# EAGLE board pcb_pedale_test-H743-TLV320AIC23B (EAGLE 9.6.2)
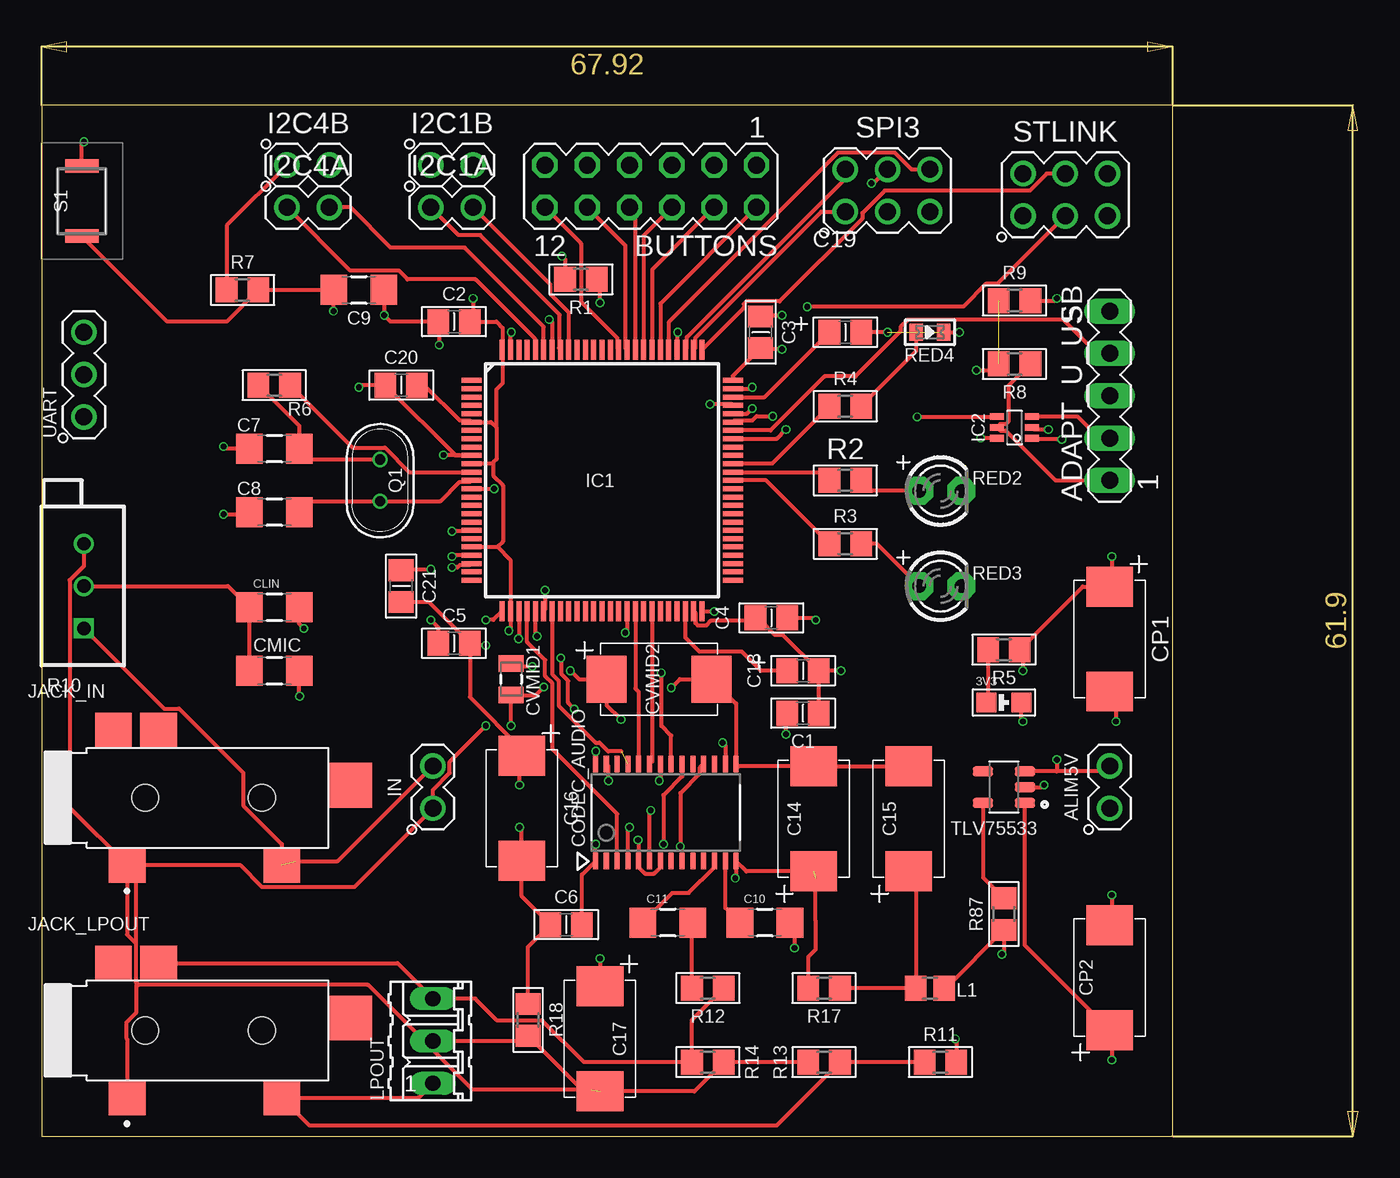
[diagram p0: board, top side]
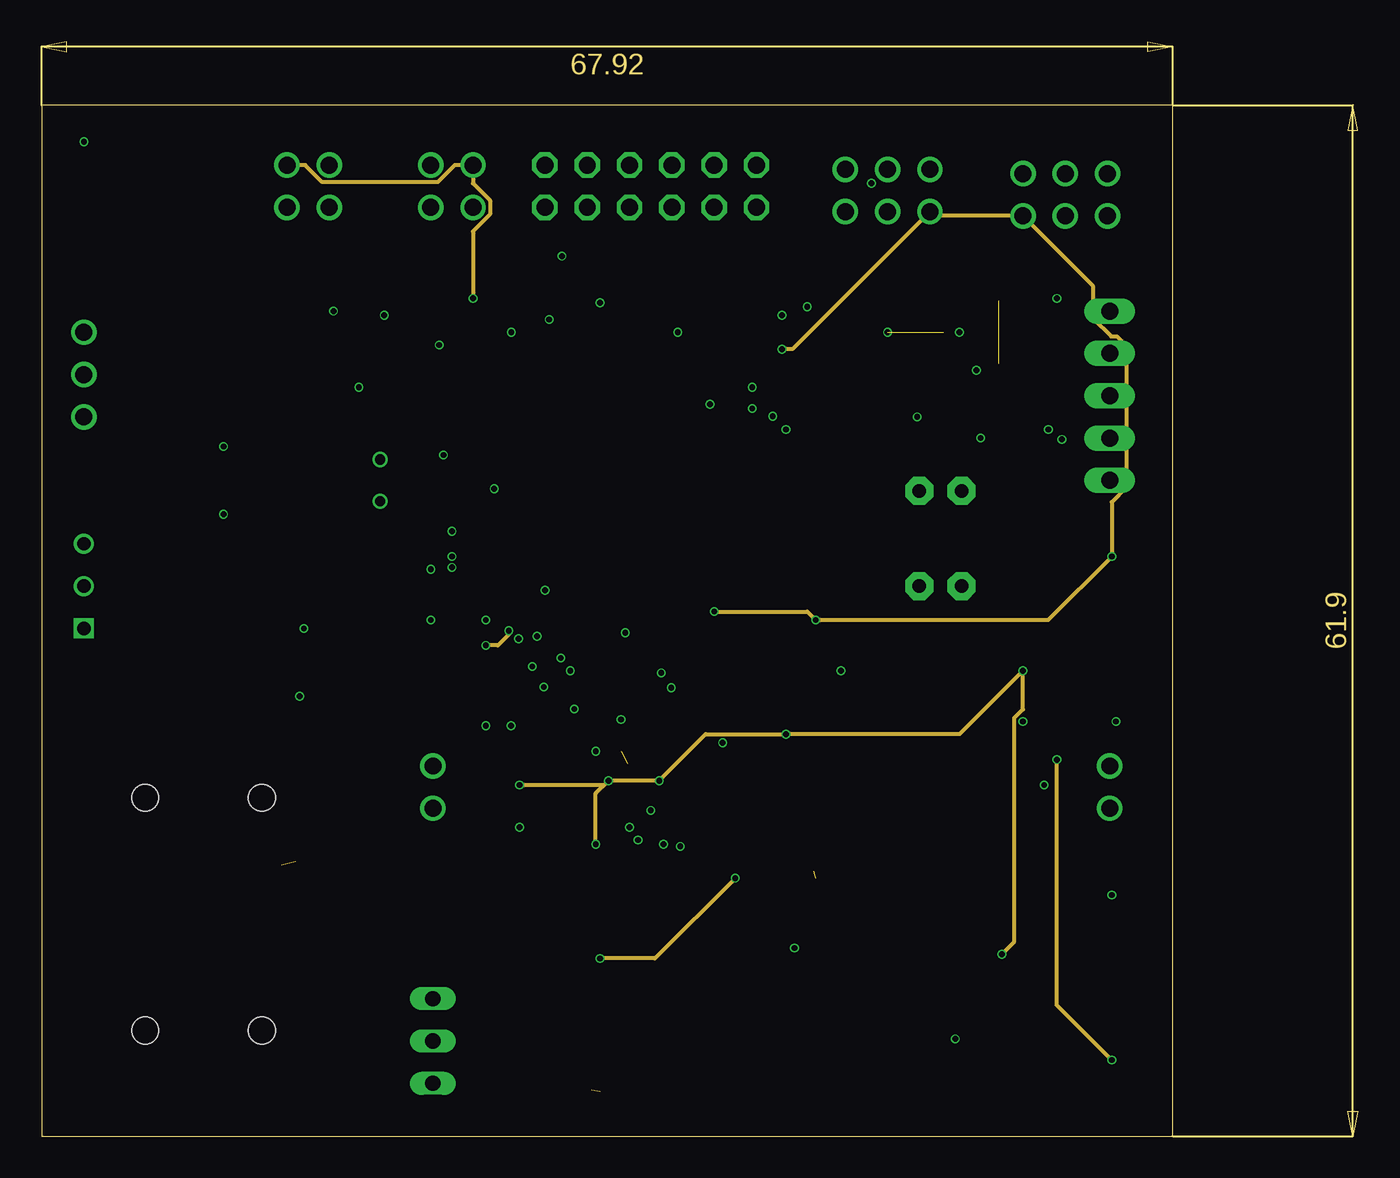
[diagram p1: board, inner layer 3V3]
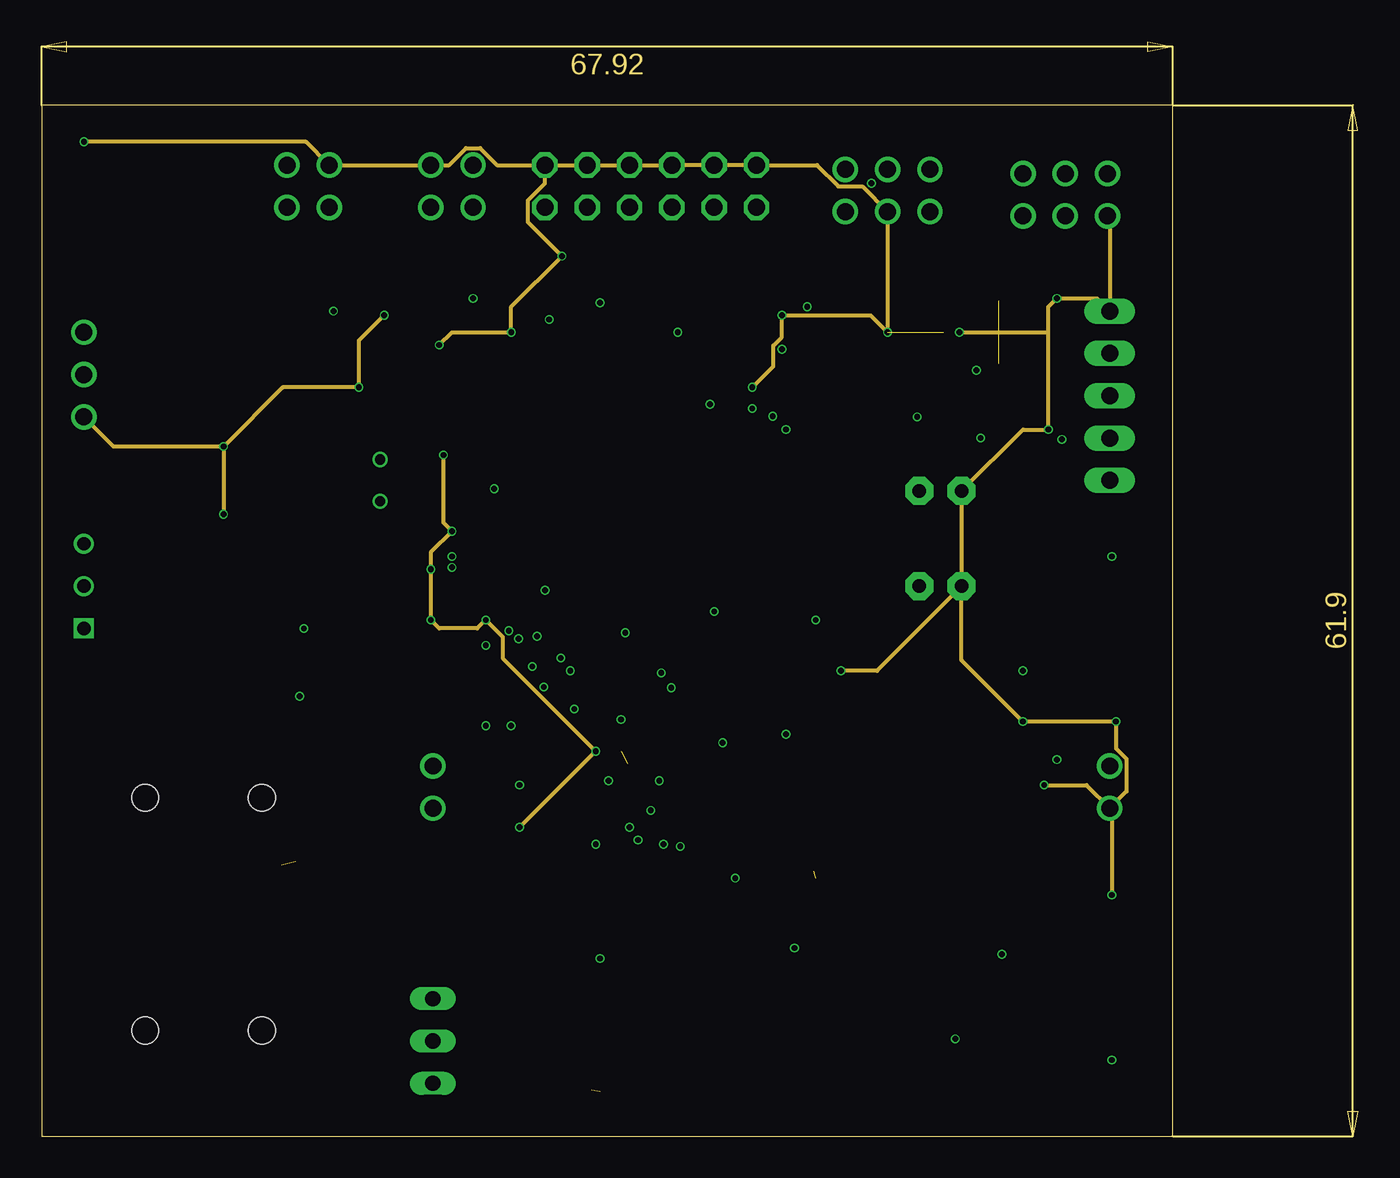
[diagram p2: board, inner layer GND]
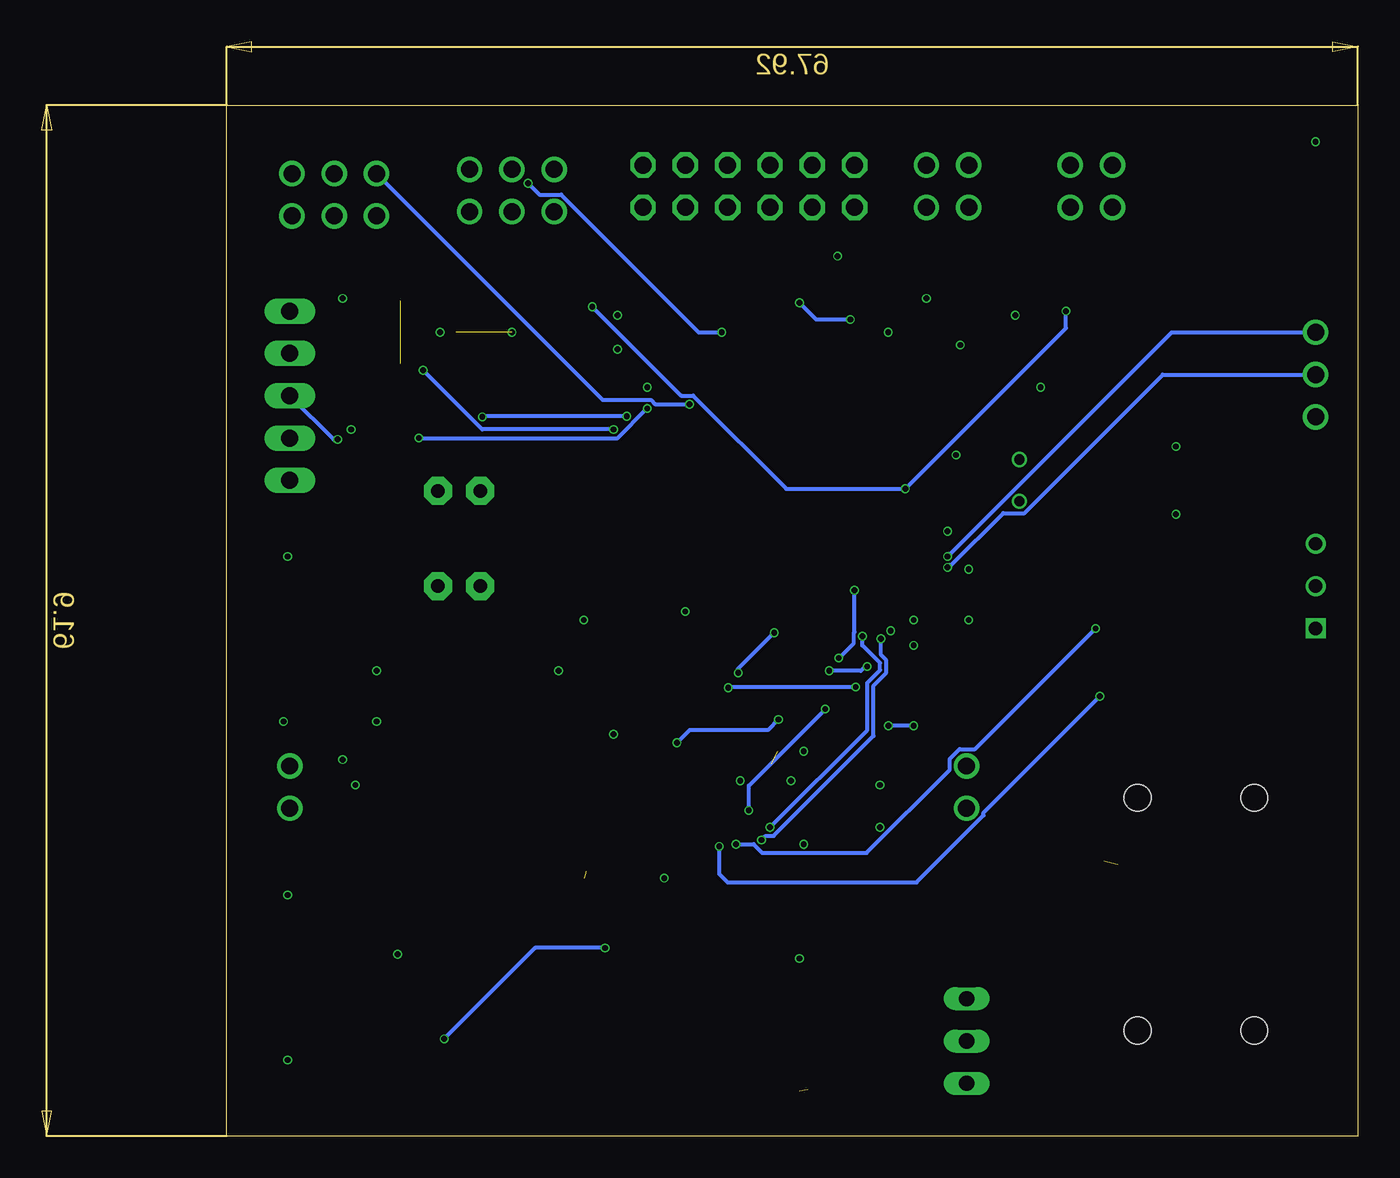
[diagram p3: board, bottom side, seen from below]

Size 67.92 x 61.9 mm. Coordinates in mm from the lower left corner, seen from the top.
Outline: 0,0 67.92,0 67.92,61.9 0,61.9 0,0
Copper layers (1+2*15+16): Top 0.035559375mm / dielectric 1.6mm / 3V3 0.0356mm / dielectric 0.1499mm / GND 0.0356mm / dielectric 0.2007mm / Bottom 0.035559375mm
Design rules "jlcpcb2layer *": minimum track width 5mil, minimum drill 12mil, track to track 5mil, track to pad 5mil, pad to pad 5mil, via to via 5mil, smd to smd 5mil, copper to edge 8mil, drill to drill 6mil, minimum pad ring 5mil, minimum via ring 3mil, stop-mask expansion 2.5mil, vias tented up to drill 0mil, thermal gap 10mil

## Footprints (pad centres in the part's own frame; a part is rotated, then mirrored left to right if it is on the bottom)
0805-LED = smd 1.2 x 1.2: A -1.05,0; C 1.05,0
MA05-1 = drill 1.016 long: 1 -5.08,0; 2 -2.54,0; 3 0,0; 4 2.54,0; 5 5.08,0
MA02-1 = drill 1.016: 1 -2.54,0; 2 0,0
MA06-2 = drill 1.016 octagon: 1 -6.35,-1.27; 2 -6.35,1.27; 3 -3.81,-1.27; 4 -3.81,1.27; 5 -1.27,-1.27; 6 -1.27,1.27; 7 1.27,-1.27; 8 1.27,1.27; 9 3.81,-1.27; 10 3.81,1.27; 11 6.35,-1.27; 12 6.35,1.27
C0805 = smd 1.3 x 1.5: 1 -0.95,0; 2 0.95,0
1206 = smd 1.6 x 1.8: 1 -1.5,0; 2 1.5,0
CPOL2917 = smd 2.4 x 2.8: + -3.15,0; - 3.15,0
CPOL0805 = smd 1.3 x 1.5: 1+ -0.95,0; 2- 0.95,0
TSSOP28 = smd 0.305 x 0.991: 1 -3.575,-2.918; 2 -2.925,-2.918; 3 -2.275,-2.918; 4 -1.625,-2.918; 5 -0.975,-2.918; 6 -0.325,-2.918; 7 0.325,-2.918; 8 0.975,-2.918; 9 1.625,-2.918; 10 2.275,-2.918; 11 2.925,-2.918; 12 3.575,-2.918; 13 4.225,-2.918; 14 4.875,-2.918; 15 4.875,2.918; 16 4.225,2.918; 17 3.575,2.918; 18 2.925,2.918; 19 2.275,2.918; 20 1.625,2.918; 21 0.975,2.918; 22 0.325,2.918; 23 -0.325,2.918; 24 -0.975,2.918; 25 -1.625,2.918; 26 -2.275,2.918; 27 -2.925,2.918; 28 -3.575,2.918
0805-CAP = smd 1 x 1.5: 1 -0.95,0; 2 0.95,0
LQFP100_14X14 = smd 1.2 x 0.3: 1 -7.85,6; 2 -7.85,5.5; 3 -7.85,5; 4 -7.85,4.5; 5 -7.85,4; 6 -7.85,3.5; 7 -7.85,3; 8 -7.85,2.5; 9 -7.85,2; 10 -7.85,1.5; 11 -7.85,1; 12 -7.85,0.5; 13 -7.85,0; 14 -7.85,-0.5; 15 -7.85,-1; 16 -7.85,-1.5; 17 -7.85,-2; 18 -7.85,-2.5; 19 -7.85,-3; 20 -7.85,-3.5; 21 -7.85,-4; 22 -7.85,-4.5; 23 -7.85,-5; 24 -7.85,-5.5; 25 -7.85,-6; 51 7.85,-6; 52 7.85,-5.5; 53 7.85,-5; 54 7.85,-4.5; 55 7.85,-4; 56 7.85,-3.5; 57 7.85,-3; 58 7.85,-2.5; 59 7.85,-2; 60 7.85,-1.5; 61 7.85,-1; 62 7.85,-0.5; 63 7.85,0; 64 7.85,0.5; 65 7.85,1; 66 7.85,1.5; 67 7.85,2; 68 7.85,2.5; 69 7.85,3; 70 7.85,3.5; 71 7.85,4; 72 7.85,4.5; 73 7.85,5; 74 7.85,5.5; 75 7.85,6 | smd 0.3 x 1.2: 26 -6,-7.85; 27 -5.5,-7.85; 28 -5,-7.85; 29 -4.5,-7.85; 30 -4,-7.85; 31 -3.5,-7.85; 32 -3,-7.85; 33 -2.5,-7.85; 34 -2,-7.85; 35 -1.5,-7.85; 36 -1,-7.85; 37 -0.5,-7.85; 38 0,-7.85; 39 0.5,-7.85; 40 1,-7.85; 41 1.5,-7.85; 42 2,-7.85; 43 2.5,-7.85; 44 3,-7.85; 45 3.5,-7.85; 46 4,-7.85; 47 4.5,-7.85; 48 5,-7.85; 49 5.5,-7.85; 50 6,-7.85; 76 6,7.85; 77 5.5,7.85; 78 5,7.85; 79 4.5,7.85; 80 4,7.85; 81 3.5,7.85; 82 3,7.85; 83 2.5,7.85; 84 2,7.85; 85 1.5,7.85; 86 1,7.85; 87 0.5,7.85; 88 0,7.85; 89 -0.5,7.85; 90 -1,7.85; 91 -1.5,7.85; 92 -2,7.85; 93 -2.5,7.85; 94 -3,7.85; 95 -3.5,7.85; 96 -4,7.85; 97 -4.5,7.85; 98 -5,7.85; 99 -5.5,7.85; 100 -6,7.85
SC70-6 = smd 0.4 x 0.85: 1 -0.65,-1.05; 2 0,-1.05; 3 0.65,-1.05; 4 0.65,1.05; 5 0,1.05; 6 -0.65,1.05
35RASMT4BHNTRX = smd 2.21 x 2.108: 1 -6.299,-4.039; 2 -4.394,4.039; 3 2.997,-4.039; 4 -7.112,4.039 | smd 2.591 x 2.692: 5 7.112,0.75 | hole 1.6: -5.207,0; 1.803,0
FB805 = smd 1.3 x 1.5: 1 -0.85,0; 2 0.85,0
03P = drill 0.914 long: 1 -2.54,0; 2 0,0; 3 2.54,0
Q-HC-46X = drill 0.61: 1 -1.25,0; 2 1.25,0
R0805 = smd 1.3 x 1.5: 1 -0.95,0; 2 0.95,0
POT-PTH = drill 0.8 square: 1 0,-2.54 | drill 0.8: 2 0,0; 3 0,2.54
LED3MM = drill 0.813 pad 1.676 octagon: A -1.27,0; K 1.27,0
0603-LED = smd 0.8 x 1: A 0.825,0; C -0.825,0
SKRKAEE020 = smd 0.8 x 2: 1 -2.1,0; 2 2.1,0
MA03-2 = drill 1.016: 1 -2.54,-1.27; 2 -2.54,1.27; 3 0,-1.27; 4 0,1.27; 5 2.54,-1.27; 6 2.54,1.27
SOT95P280X145-5N = smd 1.21 x 0.59: 1 -1.255,0.95; 2 -1.255,0; 3 -1.255,-0.95; 4 1.255,-0.95; 5 1.255,0.95
MA03-1 = drill 1.016: 1 -2.54,0; 2 0,0; 3 2.54,0

## Placement (x,y rotation side)
3V3  [0805-LED]  57.78,26.04 0 top
ADAPT_U_USB  [MA05-1]  64.14,44.45 90 top
ALIM5V  [MA02-1]  64.14,22.23 90 top
BUTTONS  [MA06-2]  36.58,57.02 180 top
C1  0.1uF  [C0805]  45.72,25.4 180 top
C2  0.1uF  [C0805]  24.77,48.9 0 top
C3  0.1uF  [C0805]  43.18,48.26 270 top
C4  0.1uF  [C0805]  43.81,31.11 0 top
C5  0.1uF  [C0805]  24.77,29.59 0 top
C6  0.1u  [C0805]  31.5,12.7 0 top
C7  12pF  [1206]  13.97,41.27 0 top
C8  12pF  [1206]  13.97,37.47 0 top
C9  0.1uF  [1206]  19.05,50.8 180 top
C10  1u  [1206]  43.43,12.83 0 top
C11  1u  [1206]  37.59,12.83 0 top
C14  10u  [CPOL2917]  46.35,19.05 90 top
C15  10u  [CPOL2917]  52.07,19.05 90 top
C16  10u  [CPOL2917]  28.83,19.68 270 top
C17  10u  [CPOL2917]  33.53,5.84 270 top
C18  2.2u  [CPOL0805]  45.72,27.94 0 top
C19  2.2u  [CPOL0805]  48.26,48.26 0 top
C20  0.1uF  [C0805]  21.59,45.09 0 top
C21  0.1uF  [C0805]  21.59,33.02 270 top
CLIN  1u  [1206]  13.97,31.75 0 top
CMIC  1u  [1206]  13.97,27.94 0 top
CODEC_AUDIO  TLV320AIC23B  [TSSOP28]  36.83,19.43 0 top
CP1  100 uF  [CPOL2917]  64.14,29.84 270 top
CP2  10u  [CPOL2917]  64.14,9.53 90 top
CVMID1  100n  [0805-CAP]  28.19,27.43 270 top
CVMID2  10u  [CPOL2917]  37.08,27.43 0 top
I2C1A  [MA02-1]  25.91,55.75 0 top
I2C1B  [MA02-1]  25.91,58.29 0 top
I2C4A  [MA02-1]  17.27,55.75 0 top
I2C4B  [MA02-1]  17.27,58.29 0 top
IC1  STM32H743VIT1Q  [LQFP100_14X14]  33.66,39.37 0 top
IC2  [SC70-6]  58.42,42.55 90 top
IN  [MA02-1]  23.5,22.23 90 top
JACK_IN  35RASMT4BHNTRX  [35RASMT4BHNTRX]  11.43,20.32 0 top
JACK_LPOUT  35RASMT4BHNTRX  [35RASMT4BHNTRX]  11.43,6.35 0 top
L1  [FB805]  53.34,8.89 180 top
LPOUT  [03P]  23.5,5.71 90 top
Q1  16MHz  [Q-HC-46X]  20.32,39.37 270 top
R1  10K  [R0805]  32.38,51.44 180 top
R2  180  [R0805]  48.26,39.37 0 top
R3  180  [R0805]  48.26,35.56 0 top
R4  180  [R0805]  48.26,43.81 0 top
R5  1k  [R0805]  57.78,29.21 180 top
R6  100  [R0805]  13.97,45.09 180 top
R7  100k  [R0805]  12.06,50.8 0 top
R8  4.7k  [R0805]  58.42,46.35 180 top
R9  10k  [R0805]  58.42,50.16 0 top
R10  [POT-PTH]  2.54,33.02 0 top
R11  100  [R0805]  53.98,4.45 0 top
R12  100  [R0805]  40.01,8.89 180 top
R13  100k  [R0805]  46.99,4.45 180 top
R14  100k  [R0805]  40.01,4.45 0 top
R17  2.2  [R0805]  46.99,8.89 180 top
R18  0  [R0805]  29.21,6.99 270 top
R87  0  [R0805]  57.78,13.34 90 top
RED2  [LED3MM]  53.98,38.73 0 top
RED3  [LED3MM]  53.98,33.02 0 top
RED4  [0603-LED]  53.34,48.26 180 top
S1  SWITCH-SKRKAEE020  [SKRKAEE020]  2.41,56.13 270 top
SPI3  [MA03-2]  50.8,56.77 0 top
STLINK  75867-331LF  [MA03-2]  61.47,56.52 0 top
TLV75533  TLV75533PDBVR  [SOT95P280X145-5N]  57.78,20.95 180 top
UART  [MA03-1]  2.54,45.72 90 top

## Library data of the parts
3V3 R10 RED4 = Passives
ADAPT_U_USB BUTTONS = con-lstb; OC_FARNELL: unknown; OC_NEWARK: unknown
ALIM5V IN UART = MyComponents
C1-C6 C20 C21 = MyComponents; MOUSER: 80-C0805C104J5RAUTO
C7-C11 CLIN CMIC CVMID1 = stock-perso
C14-C17 CVMID2 = stock-perso; MOUSER: 581-TPSE477K010R0200
C18 C19 = stock-perso; MOUSER: 581-TAJR225K016RNJ
CODEC_AUDIO = TI
CP1 CP2 = MyComponents; MOUSER: 581-TPSE477K010R0200
I2C1A I2C1B I2C4A I2C4B = STM32_pi_board
IC1 = stm32H7
IC2 = MyComponents; MOUSER: 947-STF203-22.TCT
JACK_IN JACK_LPOUT = Connectors; CREATED_BY: PCBLayout.com; DIGIKEY_PART_NUMBER: SC1488-1-ND; MANUFACTURER: Switchcraft Inc.; MPN: 35RASMT4BHNTRX
L1 = DP_devices
LPOUT = con-amp-quick; OC_FARNELL: unknown; OC_NEWARK: unknown
Q1 = MyComponents; MOUSER: 520-160-20-46X
R1-R9 R87 = MyComponents; MOUSER: 660-RK73H2ATTDD1R00F
R11-R14 R17 R18 = stock-perso; MOUSER: 660-RK73H2ATTDD1R00F
RED2 RED3 = adafruit
S1 = stock-perso; DESCRIPTION: Tactile Switches 3.9x2.9x2.0mm 160gf Packaging Temp 80oC; HEIGHT: 2mm; MANUFACTURER_NAME: ALPS; MANUFACTURER_PART_NUMBER: SKRKAEE020; MOUSER_PART_NUMBER: 688-SKRKAEE020; MOUSER_PRICE-STOCK: https://www.mouser.co.uk/ProductDetail/ALPS/SKRKAEE020?qs=MrosSN5%252BUQW89XjXIp8Ugw%3D%3D
SPI3 STLINK = MyComponents; MOUSER: 649-75867-331LF
TLV75533 = TLV75533PDBVR; AVAILABILITY: Unavailable; DESCRIPTION: Linear Voltage Regulator IC 1 Output 500mA SOT-23-5; MF: Texas Instruments; MP: TLV75533PDBVR; PACKAGE: SOT-23 Texas Instruments; PRICE: None

## Nets
3V3: C1.2 C2.2 C3.2 C4.2 C5.2 C6.2 C16.+ C20.2 C21.2 CODEC_AUDIO.1 CODEC_AUDIO.22 CODEC_AUDIO.27 CP1.+ I2C1B.2 I2C4B.1 IC1.6 IC1.11 IC1.21 IC1.27 IC1.50 IC1.75 IC1.100 L1.1 R5.1 R7.1 R87.1 SPI3.5 STLINK.1
3V3A: C14.+ C17.+ CODEC_AUDIO.14 R17.2
5V: ALIM5V.2 CP2.+ TLV75533.1 TLV75533.3
AGND: C14.- C15.- C17.- CODEC_AUDIO.15 CVMID1.2 CVMID2.- IN.1 JACK_IN.1 JACK_LPOUT.1 LPOUT.2 R10.3 R13.2 R14.2 R18.2
DM: ADAPT_U_USB.2 IC2.3
DP: ADAPT_U_USB.3 IC2.1
GND: 3V3.C ADAPT_U_USB.5 ALIM5V.1 BUTTONS.1 BUTTONS.3 BUTTONS.5 BUTTONS.7 BUTTONS.9 BUTTONS.11 C1.1 C2.1 C3.1 C4.1 C5.1 C6.1 C7.1 C8.1 C9.1 C16.- C18.2- C19.2- C20.1 C21.1 CODEC_AUDIO.28 CP1.- CP2.- I2C1B.1 I2C4B.2 IC1.10 IC1.19 IC1.26 IC1.49 IC1.74 IC1.99 IC2.2 R1.2 R9.2 R18.1 RED2.K RED3.K RED4.C S1.1 SPI3.3 STLINK.5 TLV75533.2 UART.1
HOME: BUTTONS.12 IC1.86
I2S_CK: CODEC_AUDIO.3 IC1.29
I2S_DI: CODEC_AUDIO.4 IC1.30
I2S_DO: CODEC_AUDIO.6 IC1.31
I2S_MCK: CODEC_AUDIO.25 IC1.32
I2S_WS: CODEC_AUDIO.5 CODEC_AUDIO.7 IC1.28
JACK_OUT_L: JACK_LPOUT.2 LPOUT.3 R12.1 R14.1
JACK_OUT_R: JACK_LPOUT.3 LPOUT.1 R11.1 R13.1
LED2_PWM: IC1.64 R2.1
LED3_PWM: IC1.63 R3.1
LED4_PWM: IC1.65 R4.1
LOUT: C11.1 CODEC_AUDIO.12
MICIN: CMIC.2 CODEC_AUDIO.18
N$1: IC1.94 R1.1
N$3: C11.2 R12.2
N$4: R2.2 RED2.A
N$5: IC1.12 R6.1
N$6: R3.2 RED3.A
N$7: C10.2 R11.2
N$8: CLIN.2 CODEC_AUDIO.20
N$10: C15.+ L1.2 R17.1
N$11: C18.1+ IC1.48
N$12: C19.1+ IC1.73
N$13: CLIN.1 CMIC.1 R10.2
N$20: IN.2 JACK_IN.3 R10.1
N$25: R4.2 RED4.A
N$29: CODEC_AUDIO.16 CVMID1.1 CVMID2.+
N$57: 3V3.A R5.2
N$104: C7.2 Q1.1 R6.2
N$108: R87.2 TLV75533.5
NRST: C9.2 IC1.14 R7.2 S1.2 STLINK.3
OSC_OUT: C8.2 IC1.13 Q1.2
PRESSION: BUTTONS.6 IC1.83
ROTATE_X: BUTTONS.4 IC1.82
ROTATE_Y: BUTTONS.2 IC1.81
ROUT: C10.1 CODEC_AUDIO.13
RX: IC1.23 UART.2
SCL_1: I2C4A.2 IC1.95
SCL_4: I2C1A.2 IC1.92
SDA_1: I2C4A.1 IC1.96
SDA_4: I2C1A.1 IC1.93
SPI3_MISO: IC1.79 SPI3.4
SPI3_MOSI: IC1.80 SPI3.6
SPI3_NSS: IC1.77 SPI3.1
SPI3_SCK: IC1.78 SPI3.2
SPI4_MOSI: CODEC_AUDIO.23 IC1.44
SPI4_NSS: CODEC_AUDIO.21 IC1.41
SPI4_SCK: CODEC_AUDIO.24 IC1.42
STOMP1: BUTTONS.8 IC1.84
STOMP2: BUTTONS.10 IC1.85
SWCLK: IC1.76 STLINK.4
SWDIO: IC1.72 STLINK.2
TX: IC1.22 UART.3
USB_ID: ADAPT_U_USB.4 IC1.69
USB_OTG_FS_DM: IC1.70 IC2.4
USB_OTG_FS_DP: IC1.71 IC2.6
USB_OTG_FS_VBUS: ADAPT_U_USB.1 IC2.5 R8.1
USB_OTG_FS_VBUS_3V3: IC1.68 R8.2 R9.1

## Tracks (layer width: path | path; a pad name or v marks a point on that pad's centre or on a via)
3V3  (via drill 0.35)
  Top 0.254: L1.1 54.29,8.89 R87.1 57.78,11.05 v57.66,10.92 | 25.71,29.46 C5.2 23.24,32.07 C21.2 | 25.71,29.46 25.71,26.36 28.83,23.24 28.83,22.99 | I2C4B.1 11.12,54.68 R7.1 | IC1.75 41.51,45.63 C3.2 43.25,47.24 v44.45,47.24 | 27.3,42.55 26.98,42.87 IC1.6 25.71,42.97 25.1,42.97 22.98,45.09 C20.2 | 27.3,42.55 27.3,40.64 27.11,40.45 | 27.11,40.45 27.04,40.37 IC1.11 | 27.3,42.55 27.3,44.83 27.69,45.21 27.69,47.19 IC1.100 27.69,47.25 27.69,48.51 27.3,48.9 C2.2 25.91,49.09 v25.91,50.29 | v64.26,34.8 64.26,33.12 CP1.+ 62.52,32.99 R5.1 58.93,29.02 v58.93,27.94 | C4.2 46.35,31.11 v46.48,30.99 | v44.7,24.13 44.7,25.33 C1.2 | C6.2 32.45,15.7 CODEC_AUDIO.1 33.26,17.51 v33.27,17.53 | v34.04,21.34 34.04,22.22 CODEC_AUDIO.27 | 27.11,40.45 27.11,39.66 27.7,39.08 27.7,35.7 27.37,35.37 | IC1.21 27.37,35.37 | 27.37,35.37 28.16,34.58 IC1.27 28.16,30.44 v28.05,30.34 | v26.67,29.46 25.71,29.46 | CODEC_AUDIO.22 37.16,21.41 v37.08,21.34 | IC1.50 40.36,31.52 v40.39,31.5 | 28.83,22.99 C16.+ | v28.7,21.08 28.7,22.86 28.83,22.99
  3V3 0.254: I2C4B.1 15.84,58.29 16.85,57.28 23.79,57.28 24.8,58.29 I2C1B.2 25.91,57.19 26.92,56.17 26.92,55.33 25.91,54.32 v25.91,50.29 | v44.45,47.24 45.09,47.24 SPI3.5 53.59,55.24 STLINK.1 63.12,51.05 63.12,49.11 64.22,48.01 64.56,48.01 65.15,47.41 65.15,38.95 64.26,38.06 v64.26,34.8 60.45,30.99 v46.48,30.99 45.97,31.5 v40.39,31.5 | v57.66,10.92 58.41,11.68 58.41,25.11 58.93,25.62 v58.93,27.94 55.12,24.13 v44.7,24.13 39.88,24.13 v37.08,21.34 v34.04,21.34 | v33.27,17.53 33.27,20.57 v34.04,21.34 | v26.67,29.46 27.4,29.46 28.05,30.11 v28.05,30.34 | v34.04,21.34 33.78,21.08 v28.7,21.08
  pour 3V3: 67.94,61.98 67.94,0 67.82,-0.13
3V3A  (via drill 0.35)  (1 unrouted)
  Top 0.254: C14.+ 42.32,15.9 CODEC_AUDIO.14 41.7,15.54 v41.66,15.49 | 46.35,9.21 R17.2 46.04,10.77 46.49,11.22 46.49,12.91 46.48,12.92 46.48,15.49 | v33.53,10.67 C17.+
  3V3 0.254: v41.66,15.49 36.83,10.67 v33.53,10.67
5V  (via drill 0.35)
  Top 0.254: TLV75533.1 59.04,11.47 CP2.+ 64.26,6.25 v64.26,4.57 | ALIM5V.2 63.81,21.91 60.96,21.91 | 60.96,21.91 TLV75533.3 | v60.96,22.61 60.96,21.91
  3V3 0.254: v64.26,4.57 60.96,7.87 v60.96,22.61
AGND  (via drill 0.35)  (1 unrouted)
  Top 0.254: R13.2 R14.2 39.2,2.69 C17.- 32.55,2.69 R18.2 | R18.2 28.89,5.71 LPOUT.2 | JACK_LPOUT.1 5.13,5.84 5.09,5.88 5.09,6.82 5.68,7.4 5.68,9.23 | JACK_IN.1 5.13,16.26 | 5.13,16.26 5.13,12.09 5.68,11.55 | R10.3 2.54,34.23 1.69,33.37 1.69,19.73 JACK_IN.1 | R18.2 29.78,6.04 | 5.68,9.23 5.83,9.08 19.6,9.08 25.89,2.79 33.02,2.79 | 5.68,9.23 5.68,11.55 | 5.68,11.55 5.68,15.71 5.13,16.26 | JACK_IN.1 11.91,16.28 13.22,14.97 18.78,14.97 IN.1 23.5,20.79 24.51,21.8 24.51,22.48 v26.67,24.64 | C15.- C14.- 41.85,22.2 CODEC_AUDIO.15 41.7,25.96 CVMID2.- 38.32,27.43 v37.81,26.92 | v28.19,24.64 CVMID1.2 29.68,26.48 v30.16,26.96
  Bottom 0.254: v26.67,24.64 v28.19,24.64 | v30.16,26.96 37.77,26.96 v37.81,26.92
DM
  Top 0.254: IC2.3 59.48,43.18 62.23,43.18 63.5,41.91 ADAPT_U_USB.2
DP  (via drill 0.35)
  Top 0.254: v61.26,41.83 59.53,41.83 IC2.1
  Bottom 0.254: ADAPT_U_USB.3 61.52,41.83 v61.26,41.83
GND  (via drill 0.35)  (1 unrouted)
  Top 0.254: R18.1 29.21,11.36 C6.1 28.83,14.42 C16.- 28.83,18.41 v28.7,18.54 | 49.07,48.26 C19.2- v50.8,48.26 | 2.41,58.29 S1.1 2.41,59.56 v2.54,59.69 | R9.2 60.83,50.16 v60.96,50.29 | CP1.- 64.52,26.31 v64.52,24.89 | v58.93,24.89 58.84,24.98 3V3.C | v64.26,14.48 64.26,12.8 CP2.- | C7.1 11.05,41.27 v10.92,41.4 | C8.1 12.34,37.34 v10.92,37.34 | v19.05,44.96 19.18,45.09 C20.1 24.86,40.87 25.15,40.87 | C9.1 20.57,50.78 v20.57,49.28 20.95,48.9 C2.1 23.88,48.83 v23.88,47.5 | 25.15,40.87 IC1.10 | C21.1 21.66,34.04 v23.37,34.04 | v23.37,30.99 23.82,30.54 C5.1 | v33.27,23.11 33.27,22.37 CODEC_AUDIO.28 | C1.1 C18.2- | C18.2- 44.5,30.11 44.01,30.11 43.16,30.96 | C4.1 43.01,31.11 43.16,30.96 | IC1.49 39.25,31.42 39.25,30.82 39.4,30.67 39.91,30.67 40.21,30.96 43.16,30.96 | v60.45,42.42 59.6,42.42 IC2.2 | RED4.C v55.12,48.26 | C3.1 43.25,49.28 v44.45,49.28 | IC1.99 28.16,48.21 v28.2,48.26 | v31.24,52.83 31.43,52.64 R1.2 | IC1.19 25.76,36.32 v24.64,36.32 | v24.13,40.89 25.12,40.89 25.15,40.87 | v48.01,27.94 C18.2- | TLV75533.2 60.07,20.95 v60.2,21.08 | IC1.74 42.58,44.87 v42.67,44.96 | IC1.26 27.12,30.99 v26.67,30.99
  GND 0.254: v2.54,59.69 15.88,59.69 I2C4B.2 I2C1B.1 24.47,58.29 25.49,59.31 26.33,59.31 27.34,58.29 BUTTONS.11 | BUTTONS.11 BUTTONS.9 BUTTONS.7 BUTTONS.5 BUTTONS.3 BUTTONS.1 46.57,58.29 47.84,57.02 49.28,57.02 SPI3.3 v50.8,48.26 49.78,49.28 v44.45,49.28 44.45,47.97 43.93,47.46 43.93,46.22 v42.67,44.96 | STLINK.5 64.14,55.12 ADAPT_U_USB.5 63.37,50.29 v60.96,50.29 60.45,49.78 60.45,48.26 | ALIM5V.1 65.15,20.7 65.15,22.65 64.52,23.28 v64.52,24.89 v58.93,24.89 55.24,28.57 RED3.K | ALIM5V.1 64.26,19.56 v64.26,14.48 | v10.92,41.4 4.32,41.4 UART.1 | v10.92,41.4 v10.92,37.34 | v10.92,41.4 14.48,44.96 v19.05,44.96 19.05,47.75 v20.57,49.28 | RED3.K RED2.K 58.93,42.42 v60.45,42.42 60.45,48.26 | v55.12,48.26 60.45,48.26 | v28.7,18.54 v33.27,23.11 27.69,28.7 27.69,29.97 v26.67,30.99 26.16,30.48 23.88,30.48 v23.37,30.99 v23.37,34.04 23.37,35.05 v24.64,36.32 24.13,36.83 v24.13,40.89 | v23.88,47.5 24.64,48.26 v28.2,48.26 28.2,49.79 v31.24,52.83 29.21,54.86 29.21,56.17 30.23,57.19 BUTTONS.11 | RED3.K 50.16,27.94 v48.01,27.94 | v60.2,21.08 62.74,21.08 ALIM5V.1
  pour Top: 67.82,61.85 67.82,0.13 67.94,0
HOME
  Top 0.254: BUTTONS.12 32.38,53.59 32.38,50.1 34.56,47.92 34.56,47.32 IC1.86
I2S_CK
  Top 0.254: CODEC_AUDIO.3 34.55,19.35 30.67,23.23 30.67,27.18 30.23,27.61 30.23,28.59 29.16,29.66 IC1.29
I2S_DI  (via drill 0.35)
  Top 0.254: CODEC_AUDIO.4 35.2,18.44 v35.31,18.54 | v29.75,30 29.66,30.1 IC1.30
  Bottom 0.254: v29.75,30 29.75,29.46 28.69,28.41 28.69,27.98 29.46,27.21 29.46,24.38 v35.31,18.54
I2S_DO  (via drill 0.35)
  Top 0.254: CODEC_AUDIO.6 36.51,19.49 v36.58,19.56 | v31.98,25.64 31.98,25.66 31.62,26.02 31.62,27.34 31.23,27.73 31.23,28.64 v31.17,28.7 | v30.23,32.77 30.23,31.59 IC1.31
  Bottom 0.254: v36.58,19.56 36.58,21.05 v31.98,25.64 | v30.23,32.77 30.23,30.26 30.27,30.22 30.27,29.61 v31.17,28.7
I2S_MCK  (1 unrouted)
  Top 0.254: 30.66,30.91 IC1.32 30.66,27.73 31.05,27.34 31.05,25.84 33.27,23.63 33.49,23.63 34.02,23.1 34.81,23.1
I2S_WS  (via drill 0.35)
  Top 0.254: IC1.28 28.66,29.88 v28.64,29.86 | CODEC_AUDIO.7 37.16,16.16 36.76,15.76 36.25,15.76 35.85,16.16 CODEC_AUDIO.5 35.85,17.74 v35.81,17.78
  Bottom 0.254: v28.64,29.86 28.64,28.89 28.31,28.57 28.31,27.82 29.08,27.05 29.08,24.04 35.09,18.03 35.57,18.03 v35.81,17.78
JACK_OUT_L
  Top 0.254: JACK_LPOUT.2 21.36,10.39 LPOUT.3 26.04,8.26 27.35,6.94 30.07,6.94 32.56,4.45 R14.1 39.05,6.99 R12.1
JACK_OUT_R
  Top 0.254: R11.1 R13.1 44.13,0.64 16.1,0.64 JACK_LPOUT.3 22.63,2.31 LPOUT.1
LED2_PWM
  Top 0.254: R2.1 46.99,39.37 47.31,39.69 47.13,39.87 IC1.64
LED3_PWM
  Top 0.254: R3.1 43.5,39.37 IC1.63
LED4_PWM
  Top 0.254: R4.1 43.87,40.37 IC1.65
LOUT
  Top 0.254: C11.1 37.87,14.61 38.85,14.61 40.41,16.16 CODEC_AUDIO.12
MICIN  (via drill 0.35)
  Top 0.254: CODEC_AUDIO.18 39.51,22.11 39.51,21.75 38.35,20.59 v38.35,17.4 | v15.49,26.42 15.47,26.44 CMIC.2
  Bottom 0.254: v38.35,17.4 38.35,15.75 37.85,15.24 26.5,15.24 22.48,19.26 22.48,19.43 v15.49,26.42
N$1  (via drill 0.35)
  Top 0.254: v33.53,50.04 33.53,51.24 R1.1 | IC1.94 30.66,48.85 v30.48,49.02
  Bottom 0.254: v30.48,49.02 32.51,49.02 v33.53,50.04
N$3
  Top 0.254: R12.2 39.05,12.79 C11.2
N$4
  Top 0.254: RED2.A 49.84,38.73 R2.2
N$5
  Top 0.254: R6.1 18.67,41.33 20.61,41.33 22.08,39.87 IC1.12
N$6
  Top 0.254: RED3.A 50.16,35.56 R3.2
N$7  (via drill 0.35)
  Top 0.254: C10.2 45.21,12.55 v45.21,11.3 | v54.86,5.84 54.92,5.78 R11.2
  Bottom 0.254: v45.21,11.3 49.4,11.3 v54.86,5.84
N$8  (via drill 0.35)
  Top 0.254: v37.34,17.53 37.34,20.48 38.47,21.61 38.47,22.34 CODEC_AUDIO.20 | v15.75,30.48 15.47,30.76 CLIN.2
  Bottom 0.254: v37.34,17.53 36.29,17.53 35.77,17.01 29.5,17.01 24.51,22 24.51,22.65 23.92,23.24 22.99,23.24 v15.75,30.48
N$10
  Top 0.254: C15.+ 52.49,15.48 L1.2 R17.1
N$11
  Top 0.254: C18.1+ 43.19,27.94 42.05,29.09 39.49,29.09 38.66,29.93 IC1.48
N$12
  Top 0.254: IC1.73 43.42,44.37 C19.1+
N$13
  Top 0.254: R10.2 11.2,33.02 CLIN.1 CMIC.1
N$20  (1 unrouted)
  Top 0.254: IN.2 17.78,16.51 15.24,16.51 | R10.1 7.35,25.67 8.25,25.67 12.1,21.81 12.1,19.85 14.43,17.53 JACK_IN.3
N$25
  Top 0.254: RED4.A 52.52,47.12 R4.2
N$29  (via drill 0.35)
  Top 0.254: v29.46,28.19 28.38,28.19 CVMID1.1 | v34.8,25.02 33.93,25.88 CVMID2.+ 32.26,27.43 v31.75,27.94 | v40.89,23.61 41.05,23.45 CODEC_AUDIO.16
  Bottom 0.254: v29.46,28.19 29.59,28.19 29.84,27.94 v31.75,27.94 | v34.8,25.02 35.43,24.38 40.12,24.38 v40.89,23.61
N$57
  Top 0.254: R5.2 56.84,26.14 3V3.A
N$104
  Top 0.254: Q1.1 16.12,40.62 C7.2 15.47,42.63 R6.2
N$108
  Top 0.254: TLV75533.5 56.53,15.54 R87.2
NRST  (via drill 0.35)
  Top 0.254: S1.2 7.55,48.9 11.11,48.9 R7.2 17.53,50.8 | 17.53,50.8 C9.2 | IC1.14 v27.17,38.87 v27.18,38.86 | v17.53,49.53 17.53,50.8 | STLINK.3 57.39,51.17 56.72,51.17 55.34,49.79 v45.97,49.79
  Bottom 0.254: v17.53,49.53 17.53,48.51 v27.18,38.86 34.32,38.86 39.92,44.46 40.64,44.46 v45.97,49.79
OSC_OUT
  Top 0.254: C8.2 16.12,38.12 Q1.2 23.95,38.12 25.1,39.27 25.71,39.27 IC1.13
PRESSION
  Top 0.254: BUTTONS.6 36.16,54.06 IC1.83
ROTATE_X
  Top 0.254: BUTTONS.4 36.66,52.02 IC1.82
ROTATE_Y
  Top 0.254: BUTTONS.2 37.16,49.98 IC1.81
ROUT
  Top 0.254: C10.1 41.05,13.71 CODEC_AUDIO.13
RX  (via drill 0.35)
  Top 0.254: IC1.23 25.71,34.27 25.1,34.27 24.97,34.15 v24.64,34.15
  Bottom 0.254: v24.64,34.15 24.5,34.28 24.42,34.28 21.3,37.41 20.02,37.41 11.71,45.72 UART.2
SCL_1
  Top 0.254: I2C4A.2 18.54,55.75 20.95,53.34 25.4,53.34 30.16,48.59 IC1.95
SCL_4
  Top 0.254: I2C1A.2 30.53,51.13 30.53,50.58 31.66,49.46 IC1.92
SDA_1
  Top 0.254: I2C4A.1 18.53,51.95 21.45,51.95 21.97,51.44 26.05,51.44 29.66,47.83 IC1.96
SDA_4
  Top 0.254: 31.06,47.32 IC1.93 31.11,47.26 31.11,49.31 26.33,54.09 25.03,54.09 I2C1A.1
SPI3_MISO  (via drill 0.35)
  Top 0.254: SPI3.4 49.96,57.2 v49.83,57.2 | v38.19,48.26 38.16,48.22 IC1.79
  Bottom 0.254: v49.83,57.2 49.15,56.52 47.84,56.52 39.58,48.26 v38.19,48.26
SPI3_MOSI
  Top 0.254: IC1.80 37.68,47.24 37.68,48.89 47.84,59.05 51.22,59.05 52.24,58.04 SPI3.6
SPI3_NSS
  Top 0.254: IC1.77 39.25,47.32 39.25,47.92 46.83,55.5 SPI3.1
SPI3_SCK
  Top 0.254: IC1.78 38.75,47.32 38.75,47.96 48.26,57.47 SPI3.2
SPI4_MOSI
  Top 0.254: IC1.44 36.66,22.5 CODEC_AUDIO.23
SPI4_NSS  (via drill 0.35)
  Top 0.254: CODEC_AUDIO.21 37.8,24.04 37.21,24.64 v37.21,27.81 | IC1.41 35.16,30.33 v35.05,30.23
  Bottom 0.254: v37.21,27.81 37.21,28.07 v35.05,30.23
SPI4_SCK
  Top 0.254: CODEC_AUDIO.24 35.85,26.67 35.66,26.87 IC1.42
STOMP1
  Top 0.254: IC1.84 35.66,55.4 BUTTONS.8
STOMP2
  Top 0.254: IC1.85 35.06,47.32 35.06,53.46 BUTTONS.10
SWCLK
  Top 0.254: IC1.76 42.18,49.74 42.18,49.97 42.33,50.11 44.31,50.11 49.28,55.08 49.28,55.41 50.63,56.77 59.35,56.77 60.37,57.78 STLINK.4
SWDIO  (via drill 0.35)
  Top 0.254: IC1.72 41.43,43.94 v40.13,43.94
  Bottom 0.254: v40.13,43.94 42.2,43.94 42.46,44.2 45.35,44.2 STLINK.2
TX  (via drill 0.35)
  Top 0.254: IC1.22 24.71,34.87 v24.64,34.8
  Bottom 0.254: v24.64,34.8 21.03,38.41 11.19,48.26 UART.3
USB_ID
  Top 0.254: ADAPT_U_USB.4 63.37,46.99 61.35,49.01 52.01,49.01 51.58,48.58 51.58,48.31 48.88,45.61 47.02,45.61 43.78,42.37 IC1.69
USB_OTG_FS_DM  (via drill 0.35)
  Top 0.254: IC1.70 41.6,42.97 42.68,42.97 42.94,43.22 v43.9,43.22 | v52.58,43.18 57.35,43.18 IC2.4
  Bottom 0.254: v43.9,43.22 52.53,43.22 v52.58,43.18
USB_OTG_FS_DP  (via drill 0.35)
  Top 0.254: IC2.6 56.4,41.9 v56.39,41.91 | IC1.71 42.35,43.37 v42.67,43.69
  Bottom 0.254: v56.39,41.91 44.45,41.91 v42.67,43.69
USB_OTG_FS_VBUS
  Top 0.254: R8.1 58.05,45.03 58.05,42.89 57.9,42.74 57.57,42.74 IC2.5 57.57,42.35 57.9,42.35 60.88,39.37 ADAPT_U_USB.1
USB_OTG_FS_VBUS_3V3  (via drill 0.35)  (1 unrouted)
  Top 0.254: IC1.68 44.15,41.87 v44.7,42.43 | v56.13,45.97 57.09,45.97 R8.2
  Bottom 0.254: v44.7,42.43 52.59,42.43 v56.13,45.97

## Text on the board
tDocu: ToneCrafter v1 - ENSEA 2021 | TX / RX / GND